# EAGLE board gyro (EAGLE 9.6.2)
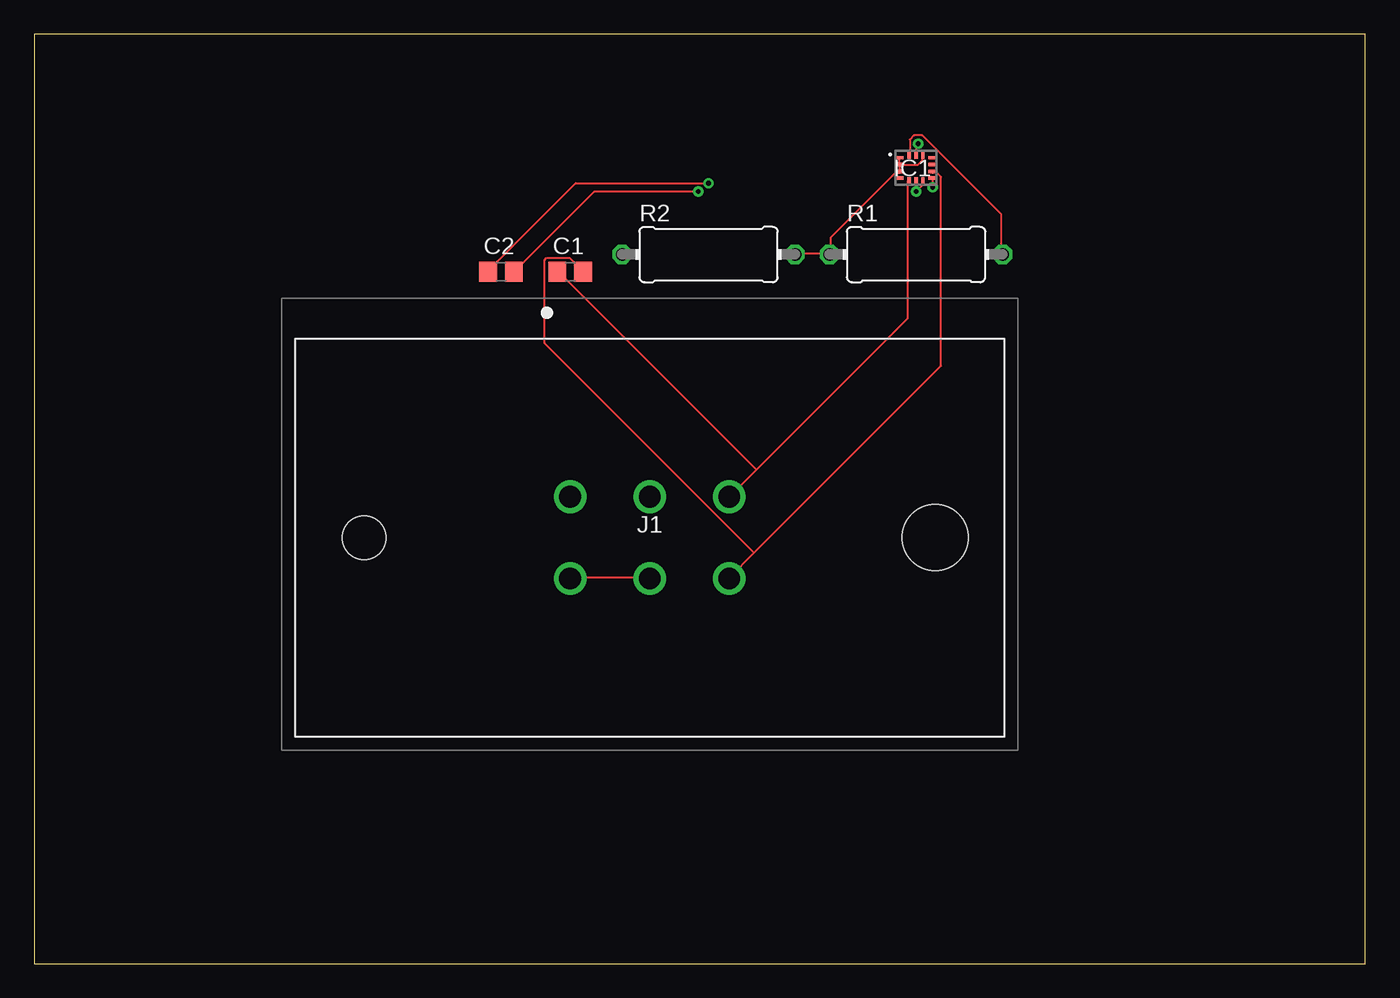
[diagram p0: board, top side]
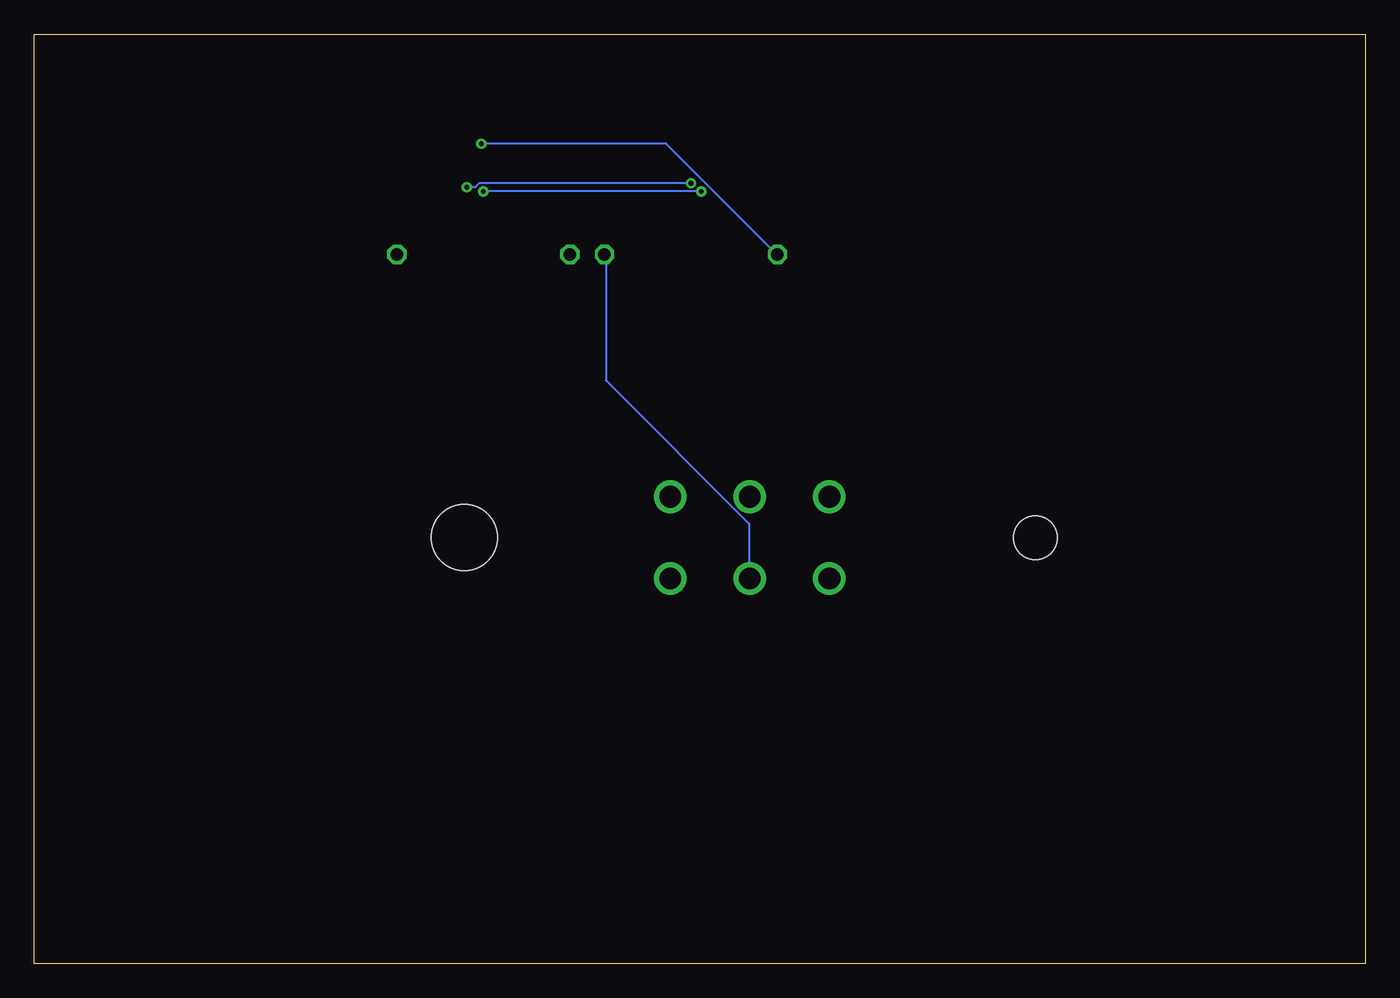
[diagram p1: board, bottom side, seen from below]

Size 97.77 x 68.25 mm. Coordinates in mm from the lower left corner, seen from the top.
Outline: 0,0 97.77,0 97.77,68.25 0,68.25 0,0
Copper layers (1*16): Top 0.035mm / dielectric 1.5mm / Bottom 0.035mm
Design rules "default": minimum track width 6mil, minimum drill 0.35mm, track to track 6mil, track to pad 6mil, pad to pad 6mil, via to via 6mil, smd to smd 6mil, copper to edge 40mil, drill to drill 6mil, minimum pad ring 10mil, minimum via ring 8mil, stop-mask expansion 4mil, vias tented up to drill 0mil, thermal gap 10mil

## Footprints (pad centres in the part's own frame; a part is rotated, then mirrored left to right if it is on the bottom)
C0805 = smd 1.3 x 1.5: 1 -0.95,0; 2 0.95,0
LGA-14(2.5X3X0.86) = smd 0.475 x 0.25: 1 -1.163,0.75; 2 -1.163,0.25; 3 -1.163,-0.25; 4 -1.163,-0.75; 8 1.163,-0.75; 9 1.163,-0.25; 10 1.163,0.25; 11 1.163,0.75 | smd 0.25 x 0.475: 5 -0.5,-0.912; 6 0,-0.912; 7 0.5,-0.912; 12 0.5,0.912; 13 0,0.912; 14 -0.5,0.912
194280004 = drill 1.6 pad 2.4: 1 0,0; 2 5.84,0; 3 11.68,0; 4 0,-6; 5 5.84,-6; 6 11.68,-6 | hole 3.2: -15.115,-3 | hole 4.86: 26.795,-3
0411/12 = drill 0.914 octagon: 1 -6.35,0; 2 6.35,0

## Placement (x,y rotation side)
C1  [C0805]  39.37,50.8 0 top
C2  [C0805]  34.29,50.8 0 top
IC1  ISM330DHCXTR  [LGA-14(2.5X3X0.86)]  64.77,58.42 0 top
J1  19428-0004  [194280004]  39.37,34.29 0 top
R1  10kOhm  [0411/12]  64.77,52.07 0 top
R2  10kOhm  [0411/12]  49.53,52.07 0 top

## Library data of the parts
C1 C2 = rcl; SPICEPREFIX: C
IC1 = ISM330DHCXTR; ARROW_PART_NUMBER: ISM330DHCXTR; ARROW_PRICE-STOCK: https://www.arrow.com/en/products/ism330dhcxtr/stmicroelectronics; DESCRIPTION: IMUs - Inertial Measurement Units VFLGA2.5X3X.86 14L P.5 L.475X.25; HEIGHT: mm; MANUFACTURER_NAME: STMicroelectronics; MANUFACTURER_PART_NUMBER: ISM330DHCXTR; MOUSER_PART_NUMBER: 511-ISM330DHCXTR; MOUSER_PRICE-STOCK: https://www.mouser.co.uk/ProductDetail/STMicroelectronics/ISM330DHCXTR?qs=%252B6g0mu59x7Jv2Xps2dM6Xw%3D%3D
J1 = SamacSys_Parts; ARROW_PART_NUMBER: 19428-0004; DESCRIPTION: Automotive Connectors; HEIGHT: 40.04mm; MANUFACTURER_NAME: Molex; MANUFACTURER_PART_NUMBER: 19428-0004; MOUSER_PART_NUMBER: 538-19428-0004; MOUSER_PRICE-STOCK: https://www.mouser.co.uk/ProductDetail/Molex/19428-0004?qs=l0xbah4rxIfd5Eogy17VMg%3D%3D
R1 R2 = rcl; SPICEPREFIX: R

## Nets
GND: C1.2 IC1.9 J1.6
N$1: IC1.1 IC1.2 IC1.3 IC1.12 J1.4 J1.5 R1.1 R2.2
N$2: C2.2 IC1.7
N$3: IC1.13 R2.1
N$4: C2.1 IC1.8
N$5: IC1.14 R1.2
N$6: C1.1 IC1.5 J1.3

## Tracks (layer width: path | path; a pad name or v marks a point on that pad's centre or on a via)
GND
  Top 0.152: 52.88,30.18 51.05,28.35 J1.6 | 52.88,30.18 66.6,43.89 66.6,57.76 66.29,58.06 65.99,58.06 IC1.9 | 52.88,30.18 37.49,45.57 37.49,51.66 37.64,51.82 39.32,51.82 40.23,50.9 C1.2
N$1
  Top 0.152: J1.4 39.47,28.35 45.11,28.35 J1.5 | 63.55,58.67 63.55,58.22 IC1.3 63.55,58.06 63.25,58.06 58.52,53.34 58.52,52.12 R1.1 58.37,52.12 55.93,52.12 R2.2 | 63.55,58.67 63.55,59.13 IC1.1 | 63.55,58.67 IC1.2 63.7,58.67 64.92,58.67 65.23,58.98 65.23,59.28 IC1.12
  Bottom 0.152: J1.5 45.26,28.35 45.26,32.31 55.78,42.82 55.78,51.97 R2.2
N$2  (via drill 0.35)
  Top 0.152: v64.77,56.69 65.23,57.15 65.23,57.45 IC1.7 | v48.77,56.69 41.15,56.69 35.36,50.9 C2.2
  Bottom 0.152: v48.77,56.69 v64.77,56.69
N$3  (via drill 0.35)
  Top 0.152: IC1.13 64.77,60.05 v64.92,60.2
  Bottom 0.152: v64.92,60.2 51.36,60.2 43.28,52.12 R2.1
N$4  (via drill 0.35)
  Top 0.152: v65.99,57 65.99,57.61 IC1.8 | v49.53,57.3 39.78,57.3 33.38,50.9 C2.1
  Bottom 0.152: v65.99,57 65.38,57 65.08,57.3 v49.53,57.3
N$5
  Top 0.152: IC1.14 64.31,59.44 64.31,60.5 64.62,60.81 65.23,60.81 71.02,55.02 71.02,52.12 R1.2
N$6
  Top 0.152: 53.03,36.27 J1.3 | 53.03,36.27 64.16,47.4 64.16,57.45 IC1.5 | 53.03,36.27 38.56,50.75 C1.1